# Allegro board SCHEMA_1.brd
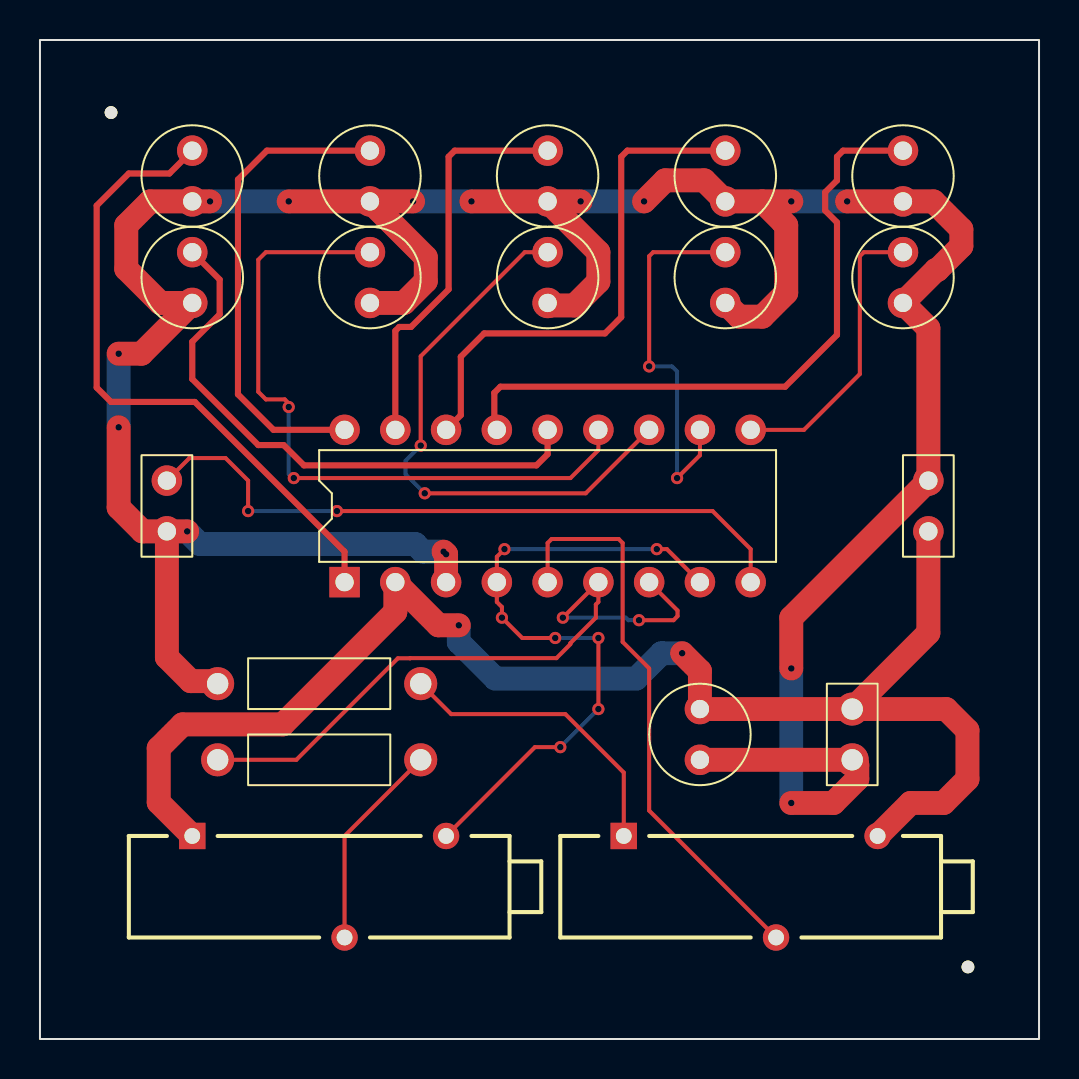
[diagram p0: board, top side]
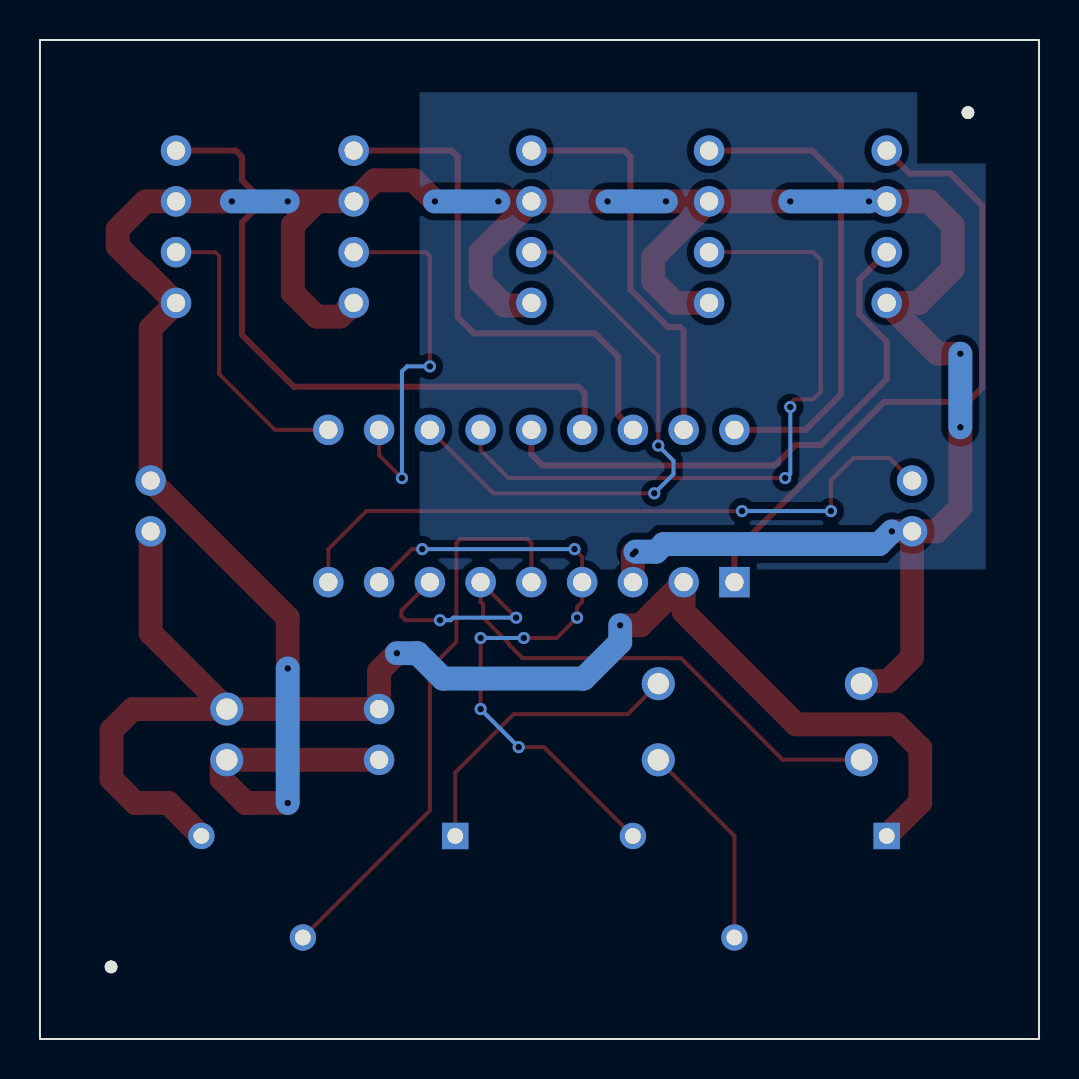
[diagram p1: board, bottom side, seen from below]

Outline 49.99 x 49.99 mm; copper layers: TOP, BOTTOM. Coordinates in mm from the lower left corner of the outline.
Outline path: rectangle 0,0 49.99,49.99

## Design rules (mm)
nets with their own width: min track width 0.201; nets N00909 N00916 N00952 N00963 N00970 N00986 N00998 N01013 N01026 N01189 N01782 N03276 N04527 N04721 N04837 N04877
nets with their own width: min track width 1.194; nets +V GND

## Placement (name value [footprint] x y rotation side)
C1  10uF/50V  [CAP196]  33.02 13.97 0 top
C2  0.1uF  [CAPCK05]  40.64 13.97 0 top
CN1  BATTERY 12 VDC  [JUMPER2]  44.45 27.94 270 top
D1  YELLOW LED  [CAP196]  7.62 41.91 0 top
D2  YELLOW LED  [CAP196]  16.51 41.91 0 top
D3  YELLOW LED  [CAP196]  25.4 41.91 0 top
D4  GREEN LED  [CAP196]  34.29 41.91 0 top
D5  GREEN LED  [CAP196]  43.18 41.91 0 top
D6  GREEN LED  [CAP196]  7.62 36.83 0 top
D7  GREEN LED  [CAP196]  16.51 36.83 0 top
D8  GREEN LED  [CAP196]  25.4 36.83 0 top
D9  RED LED  [CAP196]  34.29 36.83 0 top
D10  RED LED  [CAP196]  43.18 36.83 0 top
J1  MODE JUMPER  [JUMPER2]  6.35 27.94 270 top
NOREF  -  [unnamed]  3.56 46.35 0 top
NOREF#2  -  [unnamed]  46.43 3.61 0 top
PR1  4.7K/5K PRESET  [VRES61]  7.62 10.16 0 top
PR2  4.7K/5K PRESET  [VRES61]  29.21 10.16 0 top
R1  4.7K  [RES400]  8.89 17.78 270 top
R2  1.2K  [RES400]  8.89 13.97 270 top
U1  LM3914  [DIP18_3]  15.24 22.86 90 top

## Library data of the parts
C1 = CP: Tolerance: ***; User Part Number: ***
C2 = C: Tolerance: ***; User Part Number: ***
CN1 = CON2: User Part Number: ***
D1-D10 = LED: Tolerance: ***; User Part Number: ***
J1 = JUMPER: User Part Number: ***
PR1 PR2 = POT
R1 R2 = R: Tolerance: ***; User Part Number: ***
U1 = LM3914: Tolerance: ***; User Part Number: ***

## Footprints (pads in the part's own frame, mm; a bottom-side part is the same pattern mirrored in y, then rotated)
CAP196
  round 1.524 hole 0.914: 1(0,0) 2(0,2.54)
CAPCK05
  round 1.651 hole 1.067: 1(0,0) 2(0,2.54)
DIP18_3
  rect 1.524x1.524 hole 0.914: 1(0,0)
  round 1.524 hole 0.914: 2(0,-2.54) 3(0,-5.08) 4(0,-7.62) 5(0,-10.16) 6(0,-12.7) 7(0,-15.24) 8(0,-17.78) 9(0,-20.32) 10(7.62,-20.32) 11(7.62,-17.78) 12(7.62,-15.24) 13(7.62,-12.7) 14(7.62,-10.16) 15(7.62,-7.62) 16(7.62,-5.08) 17(7.62,-2.54) 18(7.62,0)
JUMPER2
  round 1.524 hole 0.914: 1(0,0) 2(2.54,0)
RES400
  round 1.651 hole 1.067: 1(0,0) 2(0,10.16)
unnamed
  round 0.635 hole 3.251 unplated: (0,0)
VRES61
  rect 1.321x1.321 hole 0.787: 1(0,0)
  round 1.321 hole 0.787: 2(7.62,-5.08) 3(12.7,0)

## Nets
GND: C1.2 C2.2 CN1.2 PR1.1 PR2.3 U1.2(V-)
+V: C1.1 C2.1 CN1.1 D1.1 D2.1 D3.1 D4.1 D5.1 D6.1 D7.1 D8.1 D9.1 D10.1 J1.2 R1.1 U1.3
N00909: D10.2(CATHODE) U1.10
N00916: D9.2(CATHODE) U1.11
N00952: D8.2(CATHODE) U1.12
N00963: D1.2(CATHODE) U1.1
N00970: D2.2(CATHODE) U1.18
N00986: D3.2(CATHODE) U1.17
N00998: D4.2(CATHODE) U1.16
N01013: D5.2(CATHODE) U1.15
N01026: D7.2(CATHODE) U1.13
N01189: D6.2(CATHODE) U1.14
N01782: J1.1 U1.9
N03276: R2.1 U1.6 U1.7
N04527: PR1.3 U1.4 U1.8
N04721: PR2.2(WIPER) U1.5
N04837: PR2.1 R1.2
N04877: PR1.2(WIPER) R2.2

## Via types
v1: diameter 0.61, hole 0.33, TOP to BOTTOM, 34 vias

## Routing (per net, layer and track width the routed paths; a pad name or vN(x,y) marks a point on that pad's centre or on a via; arc(x,y) is an arc through that point)
GND: length 74.2
  TOP w1.194: C2.2 45.34,16.51 46.41,15.44 46.41,13 45.21,11.81 43.56,11.81 PR2.3 ; C2.2 44.45,20.32 CN1.2 ; C2.2 C1.2 33.02,18.41 v1(32.13,19.3) ; PR1.1 5.94,11.84 5.94,14.55 7.13,15.74 12.15,15.74 17.78,21.37 U1.2 19.94,20.7 v1(20.95,20.7)
  BOTTOM w1.194: v1(32.13,19.3) 31.1,19.3 29.83,18.03 22.78,18.03 20.95,19.86 v1(20.95,20.7)
+V: length 161.7
  TOP w1.194: v1(40.39,41.91) D5.1 44.7,41.91 46.1,40.51 46.1,39.67 44.91,38.48 44.83,38.48 D10.1 44.45,35.56 CN1.1 37.59,21.08 v1(37.59,18.54) ; D2.1 19.3,39.12 19.3,37.92 18.21,36.83 D7.1 ; D2.1 v1(18.67,41.91) ; D2.1 v1(12.45,41.91) ; R1.1 8.76,17.91 7.54,17.91 6.35,19.1 J1.2 ; v1(8.51,41.91) D1.1 5.51,41.91 4.32,40.72 4.32,38.53 6.02,36.83 D6.1 5.08,34.29 v1(3.94,34.29) ; D3.1 27.94,39.37 27.94,37.9 26.75,36.7 25.53,36.7 D8.1 ; D3.1 v1(21.59,41.91) ; D3.1 v1(27.05,41.91) ; J1.2 5.13,25.4 3.94,26.59 v1(3.94,30.61) ; J1.2 v1(7.37,25.4) ; 36.14,41.91 37.17,40.88 37.17,40.88 37.34,40.72 37.34,37.34 36.14,36.14 34.98,36.14 D9.1 ; 36.14,41.91 v1(37.59,41.91) ; 36.14,41.91 D4.1 33.24,42.96 31.28,42.96 v1(30.23,41.91) ; v1(20.19,24.38) v1(20.32,24.26) U1.3 ; v1(37.59,11.81) 39.7,11.81 40.89,13 40.89,13.72 C2.1 C1.1
  BOTTOM w1.194: v1(18.67,41.91) v1(21.59,41.91) ; v1(27.05,41.91) v1(30.23,41.91) ; v1(8.51,41.91) v1(12.45,41.91) ; v1(37.59,41.91) v1(40.39,41.91) ; v1(3.94,30.61) v1(3.94,34.29) ; v1(7.37,25.4) 8,24.77 18.78,24.77 19.16,24.38 v1(20.19,24.38) ; v1(37.59,18.54) v1(37.59,11.81)
N00909: length 14.8
  TOP w0.201: U1.10 38.23,30.48 41.02,33.27 41.02,39.17 41.22,39.37 D10.2
N00916: length 19.1
  TOP w0.201: D9.2 30.68,39.37 30.48,39.17 v1(30.48,33.66) ; v1(31.88,28.07) 33.02,29.21 U1.11
  BOTTOM w0.201: v1(30.48,33.66) 31.62,33.66 31.88,33.4 v1(31.88,28.07)
N00952: length 28.6
  TOP w0.201: U1.12 27.3,27.3 v1(19.25,27.3) ; v1(19.05,29.69) 19.05,34.16 24.26,39.37 D8.2
  BOTTOM w0.201: v1(19.25,27.3) 18.29,28.27 18.29,28.93 v1(19.05,29.69)
N00963: length 32.4
  TOP w0.305: D1.2 6.48,43.31 4.45,43.31 2.84,41.7 2.84,32.6 3.56,31.88 7.75,31.88 15.24,24.38 U1.1
N00970: length 24
  TOP w0.305: D2.2 11.35,44.45 9.91,43 9.91,32.26 11.68,30.48 U1.18
N00986: length 20.2
  TOP w0.305: D3.2 20.75,44.45 20.45,44.15 20.45,37.51 18.57,35.63 17.98,35.63 17.78,35.43 U1.17
N00998: length 26.2
  TOP w0.305: U1.16 21.06,31.22 21.06,34.14 22.23,35.31 28.27,35.31 29.08,36.12 29.08,44.15 29.39,44.45 D4.2
N01013: length 33.1
  TOP w0.305: U1.15 22.73,30.61 22.73,32.33 23.04,32.64 37.29,32.64 39.88,35.23 39.88,40.86 39.29,41.45 39.29,42.37 39.88,42.96 39.88,44.15 40.18,44.45 D5.2
N01026: length 34.8
  TOP w0.201: U1.13 27.94,29.46 26.54,28.07 v1(12.7,28.07) ; D7.2 11.3,39.37 10.92,38.99 10.92,32.38 11.3,32 12.25,32 12.45,31.8 v1(12.45,31.62)
  BOTTOM w0.201: v1(12.45,31.62) 12.45,28.27 12.65,28.07 v1(12.7,28.07)
N01189: length 28.5
  TOP w0.305: D6.2 8.99,38 8.99,36.26 7.62,34.89 7.62,33.02 10.92,29.72 12.19,29.72 13.21,28.7 24.84,28.7 25.4,29.26 U1.14
N01782: length 34.1
  TOP w0.201: J1.1 7.48,29.07 9.29,29.07 10.41,27.94 v1(10.41,26.42) ; v1(14.86,26.42) 33.66,26.42 35.56,24.51 U1.9
  BOTTOM w0.201: v1(10.41,26.42) v1(14.86,26.42)
N03276: length 34.4
  TOP w0.201: v1(29.97,20.95) 31.7,20.95 31.9,21.16 31.9,21.44 U1.7 ; R2.1 12.83,13.97 17.91,19.05 18.51,19.05 18.52,19.06 25.84,19.06 26.54,19.75 26.54,19.81 27.81,21.08 27.81,21.74 27.94,21.87 U1.6 v1(26.16,21.08)
  BOTTOM w0.201: v1(26.16,21.08) 29.31,21.08 29.44,20.95 v1(29.97,20.95)
N04527: length 33.2
  TOP w0.201: v1(25.78,20.07) 24.13,20.07 v1(23.11,21.08) 23.11,21.62 22.86,21.87 U1.4 22.86,24.13 v1(23.24,24.51) ; U1.8 31.37,24.51 v1(30.86,24.51) ; v1(27.94,20.07) v1(27.94,16.51) ; PR1.3 24.77,14.61 v1(26.04,14.61)
  BOTTOM w0.201: v1(25.78,20.07) v1(27.94,20.07) ; v1(30.86,24.51) v1(23.24,24.51) ; v1(27.94,16.51) v1(26.04,14.61)
N04721: length 28.8
  TOP w0.201: U1.5 25.4,24.82 25.6,25.02 28.95,25.02 29.15,24.82 29.15,19.87 30.48,18.54 30.48,11.43 PR2.2
N04837: length 15.2
  TOP w0.201: PR2.1 29.21,13.33 26.29,16.26 20.57,16.26 R1.2
N04877: length 10.5
  TOP w0.201: PR1.2 15.24,10.16 R2.2

## Copper pours and planes (outline as drawn; the poured copper is in the pictures)
GND on BOTTOM: 2.67,47.37 2.67,23.5 30.99,23.5 30.99,47.37

## Text on the board
XSECTION_CHART: *  SURFACE | L1 TOP CONDUCTOR | *  DIELECTRIC | L2 BOTTOM CONDUCTOR | DESIGN CROSS SECTION CHART | ___________________________ | TOTAL THICKNESS 10.4 MIL | 1-2
DEVICE_TYPE_TOP: FIGURE | FINISHED_SIZE | 13.0 | 31.0 | 36.0 | 42.0 | 128.0 | DRILL CHART: TOP to BOTTOM | ALL UNITS ARE IN MILS | PLATED | NON-PLATED | QTY | 35 | 6 | 44 | 2
